# Altium PCB SumoPCB.PcbDoc
Units mm, origin at the board's own origin, x right, y up, seen from the top; angles counter-clockwise.
Board outline 140 x 140 mm, 2 copper layers (Top Layer, Bottom Layer); 186 components, 198 nets, 758 pads, 44 vias.
Unrouted connection lines stored in the file: 502.
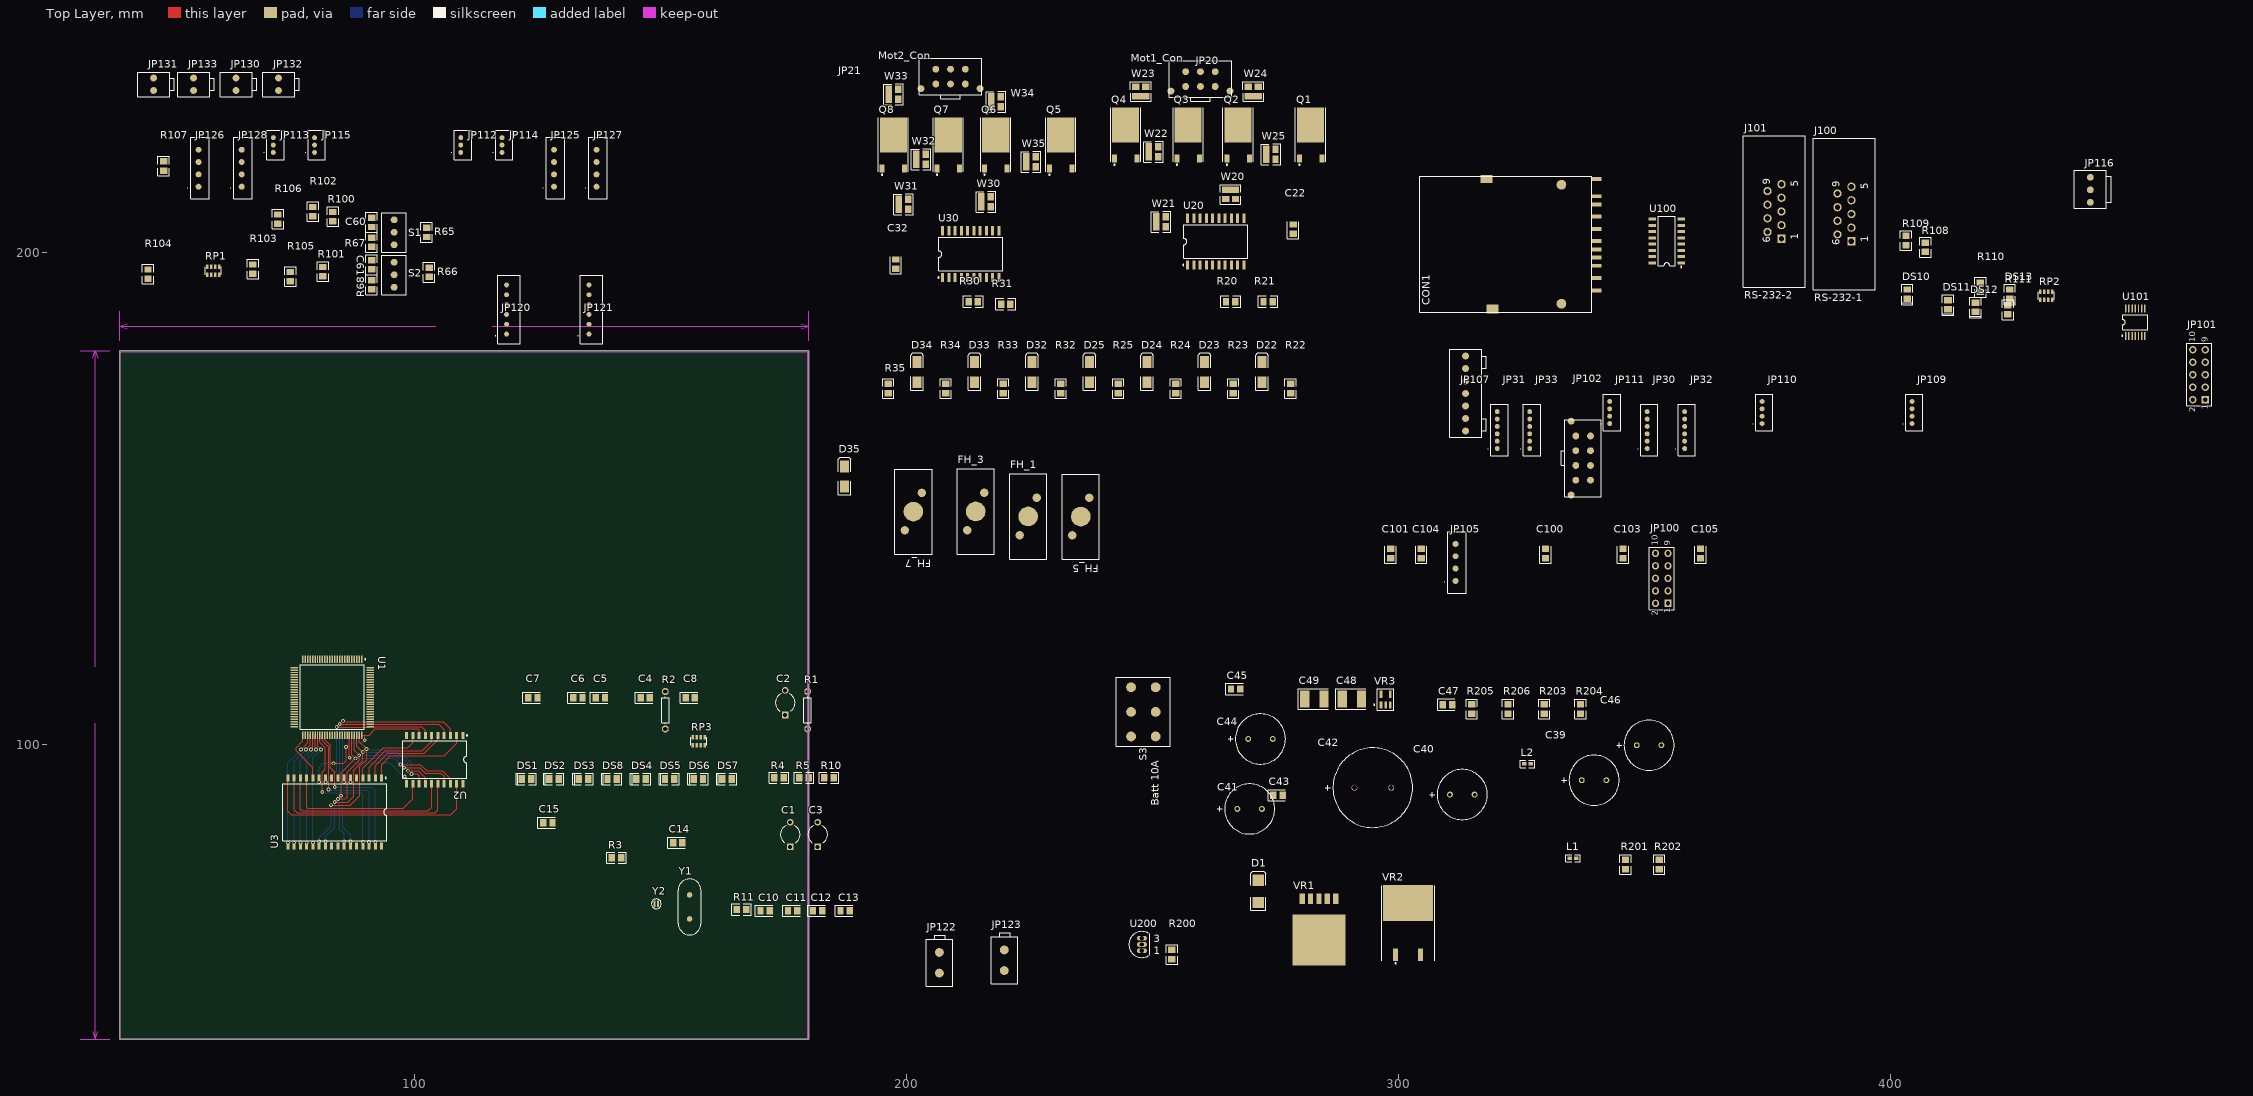
[diagram p0: Top Layer view]
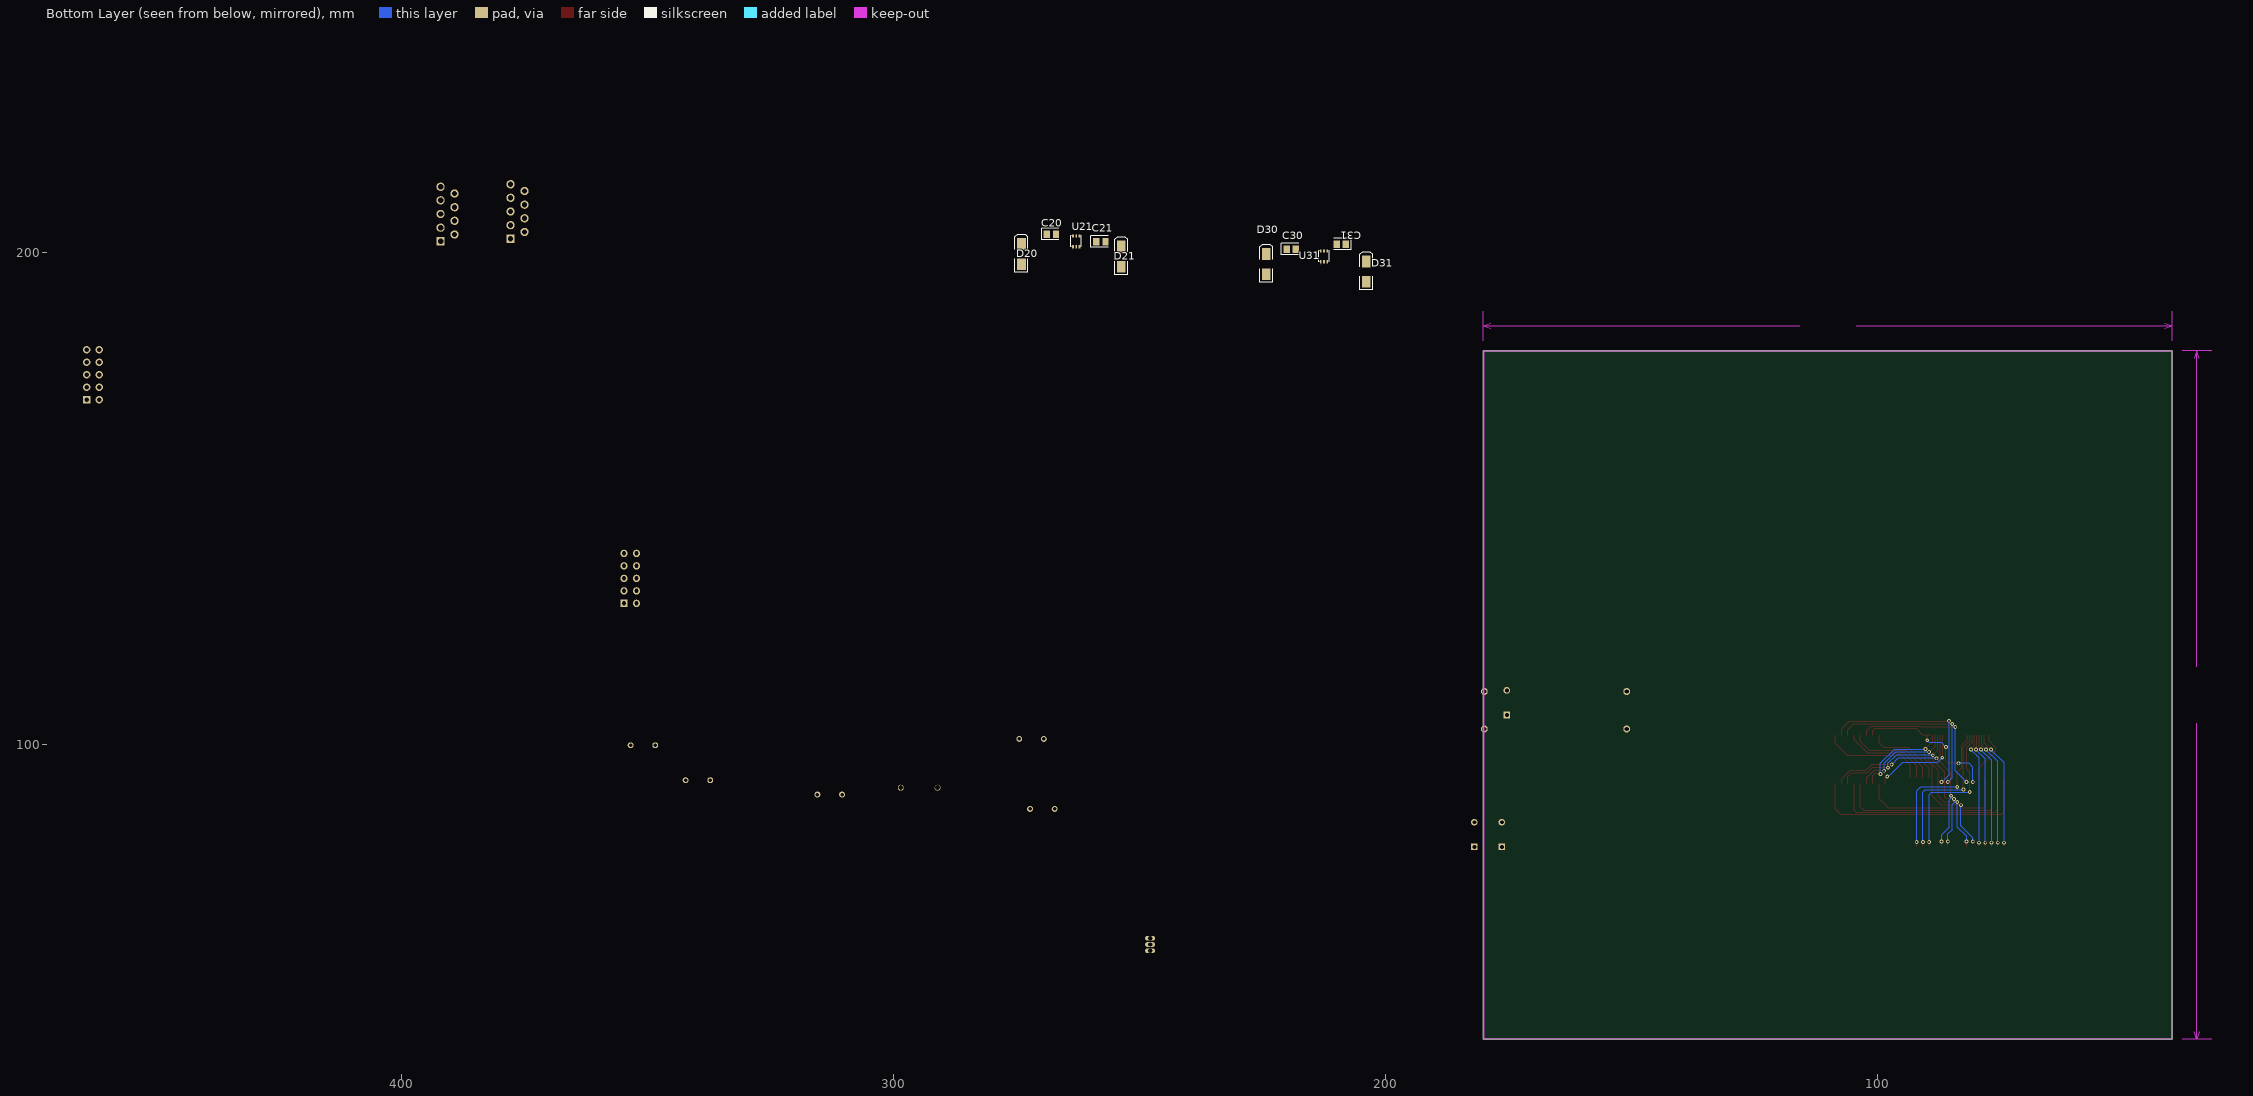
[diagram p1: Bottom Layer view, seen from below]

## Layer stack, top to bottom
Top Layer: signal copper 0.0356
Dielectric: dielectric 0.32, FR-4, Dk 4.8
Bottom Layer: signal copper 0.0356

## Board outline
40,40 180,40 180,180 40,180

## Design rules (kind name [scope] priority, off if disabled: settings)
Clearance [All] p1: gap=0.254
ComponentClearance [All] p1: gap=0.254 collisioncheckmode=0
PolygonConnect [All] p1: connectstyle=Relief reliefconductorwidth=0.254 reliefentries=4 polygonreliefangle="90 Angle"
RoomDefinition "Power Regulation and Protection" [InComponentClass('Power Regulation and Protection')] p1: confinementstyle=ConfineIn formatcopy=TRUE outline 238.633,51.816 360.299,51.816 360.299,116.078 238.633,116.078
RoomDefinition "Motor Control" [InComponentClass('Motor Control')] p2: confinementstyle=ConfineIn formatcopy=TRUE outline 184.658,129.667 289.56,129.667 289.56,242.062 184.658,242.062
RoomDefinition "Microcontroller and Memory" [InComponentClass('Microcontroller and Memory')] p3: confinementstyle=ConfineIn formatcopy=TRUE outline 56.642,56.261 192.278,56.261 192.278,123.698 56.642,123.698
RoomDefinition "Interfaces and Connectors - Sensors" [InComponentClass('Interfaces and Connectors - Sensors')] p4: confinementstyle=ConfineIn formatcopy=TRUE outline 38.608,188.468 148.209,188.468 148.209,241.3 38.608,241.3
RoomDefinition "Interfaces and Connectors" [InComponentClass('Interfaces and Connectors')] p5: confinementstyle=ConfineIn formatcopy=TRUE outline 292.354,118.11 473.329,118.11 473.329,229.108 292.354,229.108
RoutingLayers [All] p1: top layer=Horizontal bottom layer=Vertical
RoutingVias [All] p1: holewidth=0.711 width=1.27 viastyle="Through Hole" minholewidth=0.711 minwidth=1.27 maxholewidth=0.711 maxwidth=1.27
SolderMaskExpansion [All] p1: expansion=0.102
TestPointUsage [All] p1: valid=0 allowmultiple=FALSE
Testpoint [All] p1: side=15 testpointundercomponent=TRUE minsize=1.016 maxsize=2.54 preferedsize=1.524 minholesize=0 maxholesize=1.016 preferedholesize=0.813 testpointgrid=0.025 style=1023 order=1234567890
Width [All] p1: maxlimit=0.254 minlimit=0.254 preferedwidth=0.254
16 further rules are at their usual default settings.

## Classes and differential pairs
component class "Interfaces and Connectors - Sensors": C60 C61 JP112 JP113 JP114 JP115 JP120 JP121 JP125 JP126 JP127 JP128 JP130 JP131 JP132 JP133 R65 R66 R67 R68 R100 R101 R102 R103 R104 R105 R106 R107 RP1 S1 S2
component class "Interfaces and Connectors": C100 C101 C103 C104 C105 CON1 DS10 DS11 DS12 DS13 J100 J101 JP22 JP23 JP30 JP31 JP32 JP33 JP100 JP101 JP102 JP105 JP107 JP109 JP110 JP111 JP116 JP120 JP121 R108 R109 R110 R111 RP2 U100 U101
component class "Microcontroller and Memory": C1 C2 C3 C4 C5 C6 C7 C8 C10 C11 C12 C13 C14 C15 DS1 DS2 DS3 DS4 DS5 DS6 DS7 DS8 R1 R2 R3 R4 R5 R10 R11 RP3 U1 U2 U3 Y1 Y2
component class "Motor Control": C20 C21 C22 C30 C31 C32 D20 D21 D22 D23 D24 D25 D30 D31 D32 D33 D34 D35 FH_1 FH_2 FH_3 FH_4 FH_5 FH_6 FH_7 JP20 JP21 Q1 Q2 Q3 Q4 Q5 Q6 Q7 Q8 R20 R21 R22 R23 R24 R25 R30 R31 R32 R33 R34 R35 U20 U21 U30 U31 W20 W21 W22 W23 W24 W25 W30 W31 W32 W33 W34 W35
component class "Power Regulation and Protection": C39 C40 C41 C42 C43 C44 C45 C46 C47 C48 C49 D1 L1 L2 R200 R201 R202 R203 R204 R205 R206 S3 U200 VR1 VR2 VR3
net class A[8..15]: A0 A1 A2 A3 A4 A5 A6 A7 A8 A9 A10 A11 A12 A13 A14 A15
net class AD[0..7]: AD0 AD1 AD2 AD3 AD4 AD5 AD6 AD7

## Components (designator, comment, footprint, x,y, rotation, side; value= is the part's Value field where it differs from the comment)
C1 "Cap Tant" CAPR5-4X5 176.276,81.661 r90 top
C2 "Cap Tant" CAPR5-4X5 175.26,108.458 r90 top
C3 "Cap Tant" CAPR5-4X5 181.864,81.661 r90 top
C4 "20pF" CC2012-0805 146.812,109.474 r0 top
C5 "20pF" CC2012-0805 137.668,109.474 r0 top
C6 "6pF" CC2012-0805 133.096,109.474 r0 top
C7 "6pF" CC2012-0805 123.952,109.474 r0 top
C8 "100nF" CC2012-0805 155.956,109.474 r0 top
C10 "Cap Semi" CC2012-0805 171.196,66.167 r0 top
C11 "Cap Semi" CC2012-0805 176.784,66.167 r0 top
C12 "Cap Semi" CC2012-0805 181.864,66.167 r0 top
C13 "Cap Semi" CC2012-0805 187.452,66.167 r0 top
C14 "Cap Semi" CC2012-0805 153.416,80.01 r0 top
C15 "Cap Semi" CC2012-0805 127,84.074 r0 top
C20 "Cap Pol3" CC2012-0805 267.843,203.708 r180 bottom
C21 "Cap Pol3" CC2012-0805 257.793,202.184 r180 bottom
C22 "Cap" CC2012-0805 278.511,204.724 r90 top
C30 "Cap Pol3" CC2012-0805 219.075,200.66 r180 bottom
C31 "Cap Pol3" CC2012-0805 208.915,201.676 r0 bottom
C32 "Cap" CC2012-0805 197.739,197.612 r90 top
C39 "Cap Pol1" CAPPOL5-10X13 337.185,92.71 r0 top
C40 "Cap Pol1" CAPPOL5-10X13 310.388,89.789 r0 top
C41 "Cap Pol1" CAPPOL5-10X13 267.168,86.868 r0 top
C42 "Cap Pol1" CAPPOL7.5-16 290.957,91.186 r0 top
C43 "Cap Pol3" CC2012-0805 275.423,89.662 r0 top
C44 "Cap Pol1" CAPPOL5-10X13 269.367,101.092 r0 top
C45 "Cap Pol3" CC2012-0805 266.827,111.252 r0 top
C46 "Cap Pol1" CAPPOL5-10X13 348.361,99.822 r0 top
C47 "Cap Pol3" CC2012-0805 309.88,108.077 r0 top
C48 "Tant" CC4532-1812 290.449,109.22 r0 top
C49 "Low ESR 0.3-10R Tant" CC4532-1812 282.829,109.22 r0 top
C60 "Cap Semi" CR2012-0805 91.186,206.121 r90 top
C61 "Cap Semi" CR2012-0805 91.186,197.485 r270 top
C100 "Cap Semi" CC2012-0805 329.819,138.811 r90 top
C101 "Cap Semi" CC2012-0805 298.323,138.811 r90 top
C103 "Cap Semi" CC2012-0805 345.567,138.811 r90 top
C104 "Cap Semi" CC2012-0805 304.546,138.811 r90 top
C105 "Cap Semi" CC2012-0805 361.315,138.811 r90 top
CON1 "SD_CARD_CONN" "SD Card AVX" 340.233,192.278 r90 top
D1 "10BQ100" SMB 271.399,70.104 r90 top
D20 "Diode" SMA 273.939,199.644 r90 bottom
D21 "Diode" SMA 253.619,199.136 r90 bottom
D22 "Diode" SMA 272.161,175.641 r90 top
D23 "Diode" SMA 260.477,175.641 r90 top
D24 "Diode" SMA 248.793,175.641 r90 top
D25 "Diode" SMA 237.109,175.641 r90 top
D30 "Diode" SMA 224.155,197.612 r90 bottom
D31 "Diode" SMA 203.835,196.088 r90 bottom
D32 "Diode" SMA 225.425,175.641 r90 top
D33 "Diode" SMA 213.741,175.641 r90 top
D34 "Diode" SMA 202.057,175.641 r90 top
D35 "Diode" SMA 187.325,154.432 r90 top
DS1 "Bat" "SMD _LED" 122.682,92.964 r0 top
DS2 "12V" "SMD _LED" 128.27,92.964 r0 top
DS3 "5V" "SMD _LED" 134.239,92.964 r0 top
DS4 "Diag1" "SMD _LED" 145.923,92.964 r0 top
DS5 "Diag2" "SMD _LED" 151.765,92.964 r0 top
DS6 "Diag3" "SMD _LED" 157.607,92.964 r0 top
DS7 "Diag4" "SMD _LED" 163.449,92.964 r0 top
DS8 "3V3" "SMD _LED" 140.081,92.964 r0 top
DS10 "T1" "SMD _LED" 403.352,191.516 r90 top
DS11 "R1" "SMD _LED" 411.607,189.357 r90 top
DS12 "T2" "SMD _LED" 417.195,188.849 r90 top
DS13 "R2" "SMD _LED" 424.18,191.516 r90 top
FH_1 "SMot1" "FuseHolder Miniblade" 220.853,137.668 r0 top
FH_3 "SMot2" "FuseHolder Miniblade" 210.185,138.684 r0 top
FH_5 "Mot1_DC" "FuseHolder Miniblade" 239.141,154.94 r180 top
FH_7 "Mot2_DC" "FuseHolder Miniblade" 205.105,155.956 r180 top
J100 "RS-232-1" "DSUB1.385-2H9 Simple" 396.875,192.405 r90 top
J101 "RS-232-2" "DSUB1.385-2H9 Simple" 382.651,192.913 r90 top
JP20 "Mot1_Con" "microfit 2x3 3mm" 256.667,236.728 r180 top
JP21 "Mot2_Con" "microfit 2x3 3mm" 205.867,237.236 r180 top
JP30 "SPI 2" "ZHR 1x6 1.5mm" 352.679,158.623 r90 top
JP31 "SPI 3" "ZHR 1x6 1.5mm" 322.199,158.623 r90 top
JP32 "SPI 4" "ZHR 1x6 1.5mm" 360.299,158.623 r90 top
JP33 "SPI 5" "ZHR 1x6 1.5mm" 328.803,158.623 r90 top
JP100 "JTAG" HDR2X5 354.711,128.651 r90 top
JP101 "ISP" HDR2X5 463.931,170.053 r90 top
JP102 "Voltage Outputs" "microfit 2x4 3mm" 338.963,162.687 r90 top
JP105 "PORTL" "EHR 1x4 2.5mm" 311.531,133.223 r90 top
JP107 "ADC Inputs" "KK 1x7 2.54mm" 313.563,163.703 r90 top
JP109 "I2C1" "ZHR 1x4 1.5mm" 406.527,163.703 r90 top
JP110 "I2C2" "ZHR 1x4 1.5mm" 376.047,163.703 r90 top
JP111 "I2C3" "ZHR 1x4 1.5mm" 345.059,163.703 r90 top
JP112 "IRD1" "ZHR 1x3 1.5mm" 111.506,218.821 r90 top
JP113 "IRD2" "ZHR 1x3 1.5mm" 73.406,218.821 r90 top
JP114 "IRD3" "ZHR 1x3 1.5mm" 119.888,218.821 r90 top
JP115 "IRD4" "ZHR 1x3 1.5mm" 81.788,218.821 r90 top
JP116 "Snd" "KK 1x3 2.54mm" 440.563,210.185 r90 top
JP120 "Mouse1" "PHR 1x6 2mm" 118.618,183.388 r90 top
JP121 "Mouse2" "PHR 1x6 2mm" 135.382,183.388 r90 top
JP122 "B out" "Mini-Fit Jnr 2x1 4.2mm" 209.296,50.8 r90 top
JP123 "B In" "Mini-Fit Jnr 2x1 4.2mm" 222.504,51.308 r90 top
JP125 "Line1" "EHR 1x4 2.5mm" 128.27,213.36 r90 top
JP126 "Line2" "EHR 1x4 2.5mm" 56.007,213.36 r90 top
JP127 "Line3" "EHR 1x4 2.5mm" 136.906,213.36 r90 top
JP128 "Line4" "EHR 1x4 2.5mm" 64.77,213.36 r90 top
JP130 "Bmp1" "KK 1x2 2.54mm" 63.627,232.918 r90 top
JP131 "Bmp2" "KK 1x2 2.54mm" 46.863,232.918 r90 top
JP132 "Bmp3" "KK 1x2 2.54mm" 72.263,232.918 r90 top
JP133 "Bmp4" "KK 1x2 2.54mm" 54.991,232.918 r90 top
L1 "Inductor" C1005-0402 335.407,76.835 r0 top
L2 "Inductor" C1005-0402 326.136,96.012 r0 top
Q1 "IRFR2405" TO-252AA 282.067,222.504 r0 top
Q2 "IRFR2405" TO-252AA 267.335,222.504 r0 top
Q3 "IRFR2405" TO-252AA 257.175,222.504 r0 top
Q4 "IRFR2405" TO-252AA 244.475,222.504 r0 top
Q5 "IRFR2405" TO-252AA 231.267,220.472 r0 top
Q6 "IRFR2405" TO-252AA 218.059,220.472 r0 top
Q7 "IRFR2405" TO-252AA 208.407,220.472 r0 top
Q8 "IRFR2405" TO-252AA 197.231,220.472 r0 top
R1 "0K" AXIAL-0.3 179.832,106.934 r90 top
R2 "0K" AXIAL-0.3 150.876,106.934 r90 top
R3 "Res3" R2012-0805 140.97,76.962 r0 top
R4 "Res3" R2012-0805 173.99,93.218 r0 top
R5 "Res3" R2012-0805 179.07,93.218 r0 top
R10 "Res3" R2012-0805 184.15,93.218 r0 top
R11 "Res3" R2012-0805 166.37,66.421 r0 top
R20 "Res Semi" CR2012-0805 265.811,189.992 r0 top
R21 "Res Semi" CR2012-0805 273.431,189.992 r0 top
R22 "Res Semi" CR2012-0805 278.003,172.339 r90 top
R23 "Res Semi" CR2012-0805 266.319,172.339 r90 top
R24 "Res Semi" CR2012-0805 254.635,172.339 r90 top
R25 "Res Semi" CR2012-0805 242.951,172.339 r90 top
R30 "Res Semi" CR2012-0805 213.487,189.992 r0 top
R31 "Res Semi" CR2012-0805 220.091,189.484 r0 top
R32 "Res Semi" CR2012-0805 231.267,172.339 r90 top
R33 "Res Semi" CR2012-0805 219.583,172.339 r90 top
R34 "Res Semi" CR2012-0805 207.899,172.339 r90 top
R35 "Res Semi" CR2012-0805 196.215,172.339 r90 top
R65 "Res3" R2012-0805 102.362,204.089 r270 top
R66 "Res3" R2012-0805 102.87,195.961 r90 top
R67 "Res3" R2012-0805 91.186,202.057 r90 top
R68 "Res3" R2012-0805 91.186,193.421 r90 top
R100 "Res1" R2012-0805 83.312,207.264 r90 top
R101 "Res1" R2012-0805 81.28,196.088 r90 top
R102 "Res1" R2012-0805 79.248,208.28 r90 top
R103 "Res1" R2012-0805 67.056,196.596 r90 top
R104 "Res1" R2012-0805 45.72,195.58 r90 top
R105 "Res1" R2012-0805 74.676,195.072 r90 top
R106 "Res1" R2012-0805 72.136,206.756 r90 top
R107 "Res1" R2012-0805 48.895,217.551 r90 top
R108 "Res3" CR2012-0805 407.035,201.041 r90 top
R109 "Res3" CR2012-0805 403.098,202.438 r90 top
R110 "10K" CR2012-0805 418.211,192.913 r90 top
R111 "10K" CR2012-0805 423.799,188.341 r90 top
R200 "10K" R2012-0805 253.873,57.277 r90 top
R201 "Res3" R2012-0805 346.075,75.565 r90 top
R202 "Res3" R2012-0805 352.933,75.565 r90 top
R203 "Res3" R2012-0805 329.565,107.188 r90 top
R204 "Res3" R2012-0805 336.931,107.188 r90 top
R205 "Res3" R2012-0805 314.833,107.188 r90 top
R206 "Res3" R2012-0805 322.199,107.188 r90 top
RP1 "ResPack x4" "4x0603 Resistor pack" 57.785,195.453 r0 top
RP2 "ResPack x4" "4x0603 Resistor pack" 430.403,190.373 r0 top
RP3 "ResPack x4" "4x0603 Resistor pack" 156.464,99.822 r0 top
S1 "SW-SPDT" "SW SPDT" 95.758,201.549 r90 top
S2 "SW-SPDT" "SW SPDT" 95.758,192.913 r90 top
S3 "Batt 10A" "SW  DPDT" 250.571,101.6 r90 top
U1 "ATmega2560" F-QFP14X14-G100/Z17N 83.185,109.601 r270 top
U2 "74HC373M" SO-G20/Y1.45 104.013,96.901 r180 top
U3 "K6R1008C1D" SO-G32/Y1.45 83.693,86.233 r180 top
U20 "HIP4081AIBZ" SOIC20A 262.763,202.184 r0 top
U21 "SN74LVC2G14" SC70 263.847,201.168 r180 bottom
U30 "HIP4081AIBZ" SOIC20A 212.979,199.644 r0 top
U31 "SN74LVC2G14" SC70 213.487,198.12 r180 bottom
U100 "MAX232" SO-G16/C5.85 354.457,202.311 r90 top
U101 "MAX3392E" TSSOP14 449.707,185.801 r0 top
U200 "ZM33064" BCY-W3 247.777,59.309 r0 top
VR1 "LM2595S-5.0" "TO-263 5 Pin SMT" 287.147,68.58 r90 top
VR2 "MC7812CD2T" 936-03 301.879,62.484 r0 top
VR3 "TPS76333DBVR" SOT-23-5 297.307,109.093 r0 top
W20 "Jumper SMT 3Way" "Jumper SMT 3 Way" 264.795,209.296 r270 top
W21 "Jumper SMT 3Way" "Jumper SMT 3 Way" 254.127,205.232 r0 top
W22 "Jumper SMT 3Way" "Jumper SMT 3 Way" 252.603,219.456 r0 top
W23 "Jumper SMT 3Way" "Jumper SMT 3 Way" 248.539,235.204 r90 top
W24 "Jumper SMT 3Way" "Jumper SMT 3 Way" 271.399,235.204 r90 top
W25 "Jumper SMT 3Way" "Jumper SMT 3 Way" 276.479,218.948 r0 top
W30 "Jumper SMT 3Way" "Jumper SMT 3 Way" 218.567,209.296 r0 top
W31 "Jumper SMT 3Way" "Jumper SMT 3 Way" 201.803,208.788 r0 top
W32 "Jumper SMT 3Way" "Jumper SMT 3 Way" 205.359,217.932 r0 top
W33 "Jumper SMT 3Way" "Jumper SMT 3 Way" 199.771,231.14 r0 top
W34 "Jumper SMT 3Way" "Jumper SMT 3 Way" 220.599,229.616 r0 top
W35 "Jumper SMT 3Way" "Jumper SMT 3 Way" 227.711,217.424 r0 top
Y1 "16MHz" "Crystal HC49SLF" 155.829,64.516 r90 top
Y2 "32kHz" "Crystal CFS206" 148.717,67.564 r0 top

## Footprints (in the part's own frame and the unit in brackets; to place one, negate y for a bottom-side part, rotate by r counter-clockwise, add the part's x,y. Pads: shape width x height; smd on the part's side, far side on the other; paste and mask are expansions set on the pad)
"4x0603 Resistor pack" [mm] "4x0603 Resistor pack 3.2 x 1.6mm, 0.8mm Pitch"
  rect 0.5x0.9 smd: 1(0,0) 2(0.8,0) 3(1.6,0) 4(2.4,0) 5(2.4,1.6) 6(1.6,1.6) 7(0.8,1.6) 8(0,1.6)
  silkscreen extent -0.4,0 2.8,1.6
936-03 [mm] "D2-PAK/TO-263-AB; 3 Leads (1 Cropped); Body 14.7 (inc. leads) x 10.2 mm (LxW max)"
  rect 1x2.6 smd: 1(-2.54,-5.25) 3(2.54,-5.25)
  rect 10.2x7.3 smd: 4(0,5.25)
  silkscreen extent -5.4,-7.12 5.4,8.8
AXIAL-0.3 [mm]
  round 1.4 hole 0.85: 1(-3.81,0) 2(3.81,0)
  silkscreen extent -2.77,-0.76 2.77,0.76
BCY-W3 [mm]
  oval 2x1 hole 0.9: 1(0,-1.27) 2(0,0) 3(0,1.27)
  silkscreen extent -2.65,-2.65 1.55,2.65
C1005-0402 [mm]
  rect 0.9x0.7 smd: 1(-0.65,0) 2(0.65,0)
  silkscreen extent -1.5,-0.75 1.5,0.75
CAPPOL5-10X13 [mm]
  round 1.2 hole 0.7: 1(0,0) 2(5,0)
  silkscreen extent -4.06,-5.1 7.6,5.1
CAPPOL7.5-16 [mm] "7.5P, 16D, 0.8PD"
  round 1.2 hole 1: 1(0,0) 2(7.5,0)
  silkscreen extent -5.9,-8.1 11.85,8.1
CAPR5-4X5 [mm]
  rect 1.35x1.35 hole 0.8: 1(-2.5,0)
  round 1.35 hole 0.8: 2(2.5,0)
  silkscreen extent -1.69,-2 1.82,2
CC2012-0805 [mm]
  rect 1.3x1.5 smd: 1(-0.95,0) 2(0.95,0)
  silkscreen extent -2,-1.15 1.5,1.15
CC4532-1812 [mm]
  rect 1.9x3.4 smd: 1(-1.95,0) 2(1.95,0)
  silkscreen extent -3.3,-2.1 2.8,2.1
CR2012-0805 [mm]
  rect 1.3x1.5 smd: 1(-0.95,0) 2(0.95,0)
  silkscreen extent -2,-1.15 2,1.15
"Crystal CFS206" [mm] "Crystal CFS206 0.7mm pitch 0.2mm lead"
  oval 0.45x1.4 smd: 1(0,0) 2(0.7,0)
  silkscreen extent -0.65,-1 1.35,1
"Crystal HC49SLF" [mm] "HC49SLF TH 4.88mm Pitch, 0.43mm lead"
  round 1.1 smd: 1(0,0) 2(4.88,0)
  silkscreen extent -3.23,-2.32 8.12,2.32
"DSUB1.385-2H9 Simple" [mm]
  rect 1.69x1.69 hole 1.09: 1(9.86,4.88)
  round 1.69 hole 1.09: 2(12.63,4.88) 3(15.4,4.88) 4(18.17,4.88) 5(20.94,4.88) 6(11.245,7.72) 7(14.015,7.72) 8(16.785,7.72) 9(19.555,7.72)
  silkscreen extent 0,0 30.8,12.6
"EHR 1x4 2.5mm" [mm] "JST EHR 1x4 2.5mm 3A"
  round 1.2 smd: 1(0,0) 2(2.5,0) 3(5,0) 4(7.5,0)
  silkscreen extent -2.5,-2.2 10,2.2
F-QFP14X14-G100/Z17N [mm]
  rect 1.55x0.3 smd: 1(-7.725,6) 2(-7.725,5.5) 3(-7.725,5) 4(-7.725,4.5) 5(-7.725,4) 6(-7.725,3.5) 7(-7.725,3) 8(-7.725,2.5) 9(-7.725,2) 10(-7.725,1.5) 11(-7.725,1) 12(-7.725,0.5) 13(-7.725,0) 14(-7.725,-0.5) 15(-7.725,-1) 16(-7.725,-1.5) 17(-7.725,-2) 18(-7.725,-2.5) 19(-7.725,-3) 20(-7.725,-3.5) 21(-7.725,-4) 22(-7.725,-4.5) 23(-7.725,-5) 24(-7.725,-5.5) 25(-7.725,-6) 51(7.725,-6) 52(7.725,-5.5) 53(7.725,-5) 54(7.725,-4.5) 55(7.725,-4) 56(7.725,-3.5) 57(7.725,-3) 58(7.725,-2.5) 59(7.725,-2) 60(7.725,-1.5) 61(7.725,-1) 62(7.725,-0.5) 63(7.725,0) 64(7.725,0.5) 65(7.725,1) 66(7.725,1.5) 67(7.725,2) 68(7.725,2.5) 69(7.725,3) 70(7.725,3.5) 71(7.725,4) 72(7.725,4.5) 73(7.725,5) 74(7.725,5.5) 75(7.725,6)
  rect 0.3x1.55 smd: 26(-6,-7.725) 27(-5.5,-7.725) 28(-5,-7.725) 29(-4.5,-7.725) 30(-4,-7.725) 31(-3.5,-7.725) 32(-3,-7.725) 33(-2.5,-7.725) 34(-2,-7.725) 35(-1.5,-7.725) 36(-1,-7.725) 37(-0.5,-7.725) 38(0,-7.725) 39(0.5,-7.725) 40(1,-7.725) 41(1.5,-7.725) 42(2,-7.725) 43(2.5,-7.725) 44(3,-7.725) 45(3.5,-7.725) 46(4,-7.725) 47(4.5,-7.725) 48(5,-7.725) 49(5.5,-7.725) 50(6,-7.725) 76(6,7.725) 77(5.5,7.725) 78(5,7.725) 79(4.5,7.725) 80(4,7.725) 81(3.5,7.725) 82(3,7.725) 83(2.5,7.725) 84(2,7.725) 85(1.5,7.725) 86(1,7.725) 87(0.5,7.725) 88(0,7.725) 89(-0.5,7.725) 90(-1,7.725) 91(-1.5,7.725) 92(-2,7.725) 93(-2.5,7.725) 94(-3,7.725) 95(-3.5,7.725) 96(-4,7.725) 97(-4.5,7.725) 98(-5,7.725) 99(-5.5,7.725) 100(-6,7.725)
  silkscreen extent -7.85,-6.55 6.55,6.83
"FuseHolder Miniblade" [mm] "FuseHolder Miniblade"
  round 1.7 smd: 1(2.07,4.84) 2(5.53,12.46)
  round 4 smd: ""(3.8,8.65)
  silkscreen extent 0,0 7.6,17.3
HDR2X5 [mm] "Connector; Header; 5x2 Position"
  rect 1.5x1.5 hole 0.9: 1(0,0)
  round 1.5 hole 0.9: 2(0,2.54) 3(2.54,0) 4(2.54,2.54) 5(5.08,0) 6(5.08,2.54) 7(7.62,0) 8(7.62,2.54) 9(10.16,0) 10(10.16,2.54)
  silkscreen extent -1.27,-1.27 11.43,3.81
"Jumper SMT 3 Way" [mm]
  rect 1.3x3.5 smd: 1(-3.45,1)
  rect 1.3x1.5 smd: 2(-1.55,2) 3(-1.55,0)
  silkscreen extent -4.5,-1.15 -0.5,3.1
"KK 1x2 2.54mm" [mil] "KK 1x2 2.54mm 4A"
  round 55 smd: 1(0,0) 2(100,0)
  silkscreen extent -49,-167 148,128
"KK 1x3 2.54mm" [mil] "KK 1x3 2.54mm 4A"
  round 55 smd: 1(0,0) 2(100,0) 3(200,0)
  silkscreen extent -49,-167 256,128
"KK 1x7 2.54mm" [mil] "Molex KK 1x7 2.54mm 4A"
  round 55 smd: 1(0,0) 2(100,0) 3(200,0) 4(300,0) 5(400,0) 6(500,0) 7(600,0)
  silkscreen extent -49,-167 654,128
"microfit 2x3 3mm" [mm] "microfit 2x3 3mm 5A"
  round 1.4 smd: 1(0,0) 2(-3,0) 3(-6,0) 4(0,3) 5(-3,3) 6(-6,3) nc(-9,3.94) nc(3,3.94)
  silkscreen extent -9.33,-2.18 3.32,6
"microfit 2x4 3mm" [mm] "microfit 2x4 3mm 5A"
  round 1.4 smd: 1(0,0) 2(-3,0) 3(-6,0) 4(-9,0) 5(0,3) 6(-3,3) 7(-6,3) 8(-9,3) nc(-12,3.94) nc(3,3.94)
  silkscreen extent -12.32,-2.18 3.32,6
"Mini-Fit Jnr 2x1 4.2mm" [mm] "Mini-Fit Jnr 2x1 4.2mm pitch 9A"
  round 1.8 smd: 1(2.7,2.7) 2(6.9,2.7)
  silkscreen extent 0,0 10.4,5.4
"PHR 1x6 2mm" [mm] "JST PHR 1x6 2mm 2A"
  round 1 smd: 1(0,0) 2(2,0) 3(4,0) 4(6,0) 5(8,0) 6(10,0)
  silkscreen extent -2,-2.8 12,2.2
R2012-0805 [mm]
  rect 1.3x1.5 smd: 1(-0.95,0) 2(0.95,0)
  silkscreen extent -2,-1.15 2,1.15
SC70 [mm] "6 pin, 0.65 pitch"
  rect 0.35x0.66 smd: 1(0.425,0) 2(1.075,0) 3(1.725,0) 4(1.725,2.14) 5(1.075,2.14) 6(0.425,2.14)
  silkscreen extent 0,0 2.1,2.2
"SD Card AVX" [mm] "SD Card AVX 145638009211862"
  rect 0.8x2 smd: 1(2.5,0) 2(5,0) 3(8.3,0) 4(10,0) 5(12.5,0) 6(15,0) 7(17.43,0) 8(19.13,0) 9(0,0) 10(6.7,0) 11(22.62,0)
  rect 1.7x2.4 smd: 12(22.63,22.4)
  rect 1.8x2.4 smd: ""(-3.82,21.2)
  round 2 smd: ""(-2.72,7.2) ""(21.48,7.2)
  silkscreen extent -4.42,1 23.18,36
SMA [mm] "DO-214-AC/SMA; 2 C-Bend Leads; Body 5 x 2.7 mm, inc. leads (LxW)"
  rect 2.4x1.8 smd: 1(-2.05,0) 2(2.05,0)
  silkscreen extent -3.65,-1.3 3.95,1.3
SMB [mm] "DO-214-AA/SMB; 2 C-Bend Leads; Body 5.3 x 3.6 mm, inc. leads (LxW)"
  rect 2.3x2.3 smd: 1(-2.25,0) 2(2.25,0)
  silkscreen extent -3.8,-1.55 4.1,1.55
"SMD _LED" [mm]
  rect 1.3x1.6 smd: 1(0.95,0) 2(-0.95,0)
  silkscreen extent -2.13,-1.15 2,1.15
SO-G16/C5.85 [mm]
  rect 0.6x1.55 smd: 1(-4.445,-2.925) 2(-3.175,-2.925) 3(-1.905,-2.925) 4(-0.635,-2.925) 5(0.635,-2.925) 6(1.905,-2.925) 7(3.175,-2.925) 8(4.445,-2.925) 9(4.445,2.925) 10(3.175,2.925) 11(1.905,2.925) 12(0.635,2.925) 13(-0.635,2.925) 14(-1.905,2.925) 15(-3.175,2.925) 16(-4.445,2.925)
  silkscreen extent -5.39,-3.05 5,1.75
SO-G20/Y1.45 [mm]
  rect 0.6x1.45 smd: 1(-5.715,-4.925) 2(-4.445,-4.925) 3(-3.175,-4.925) 4(-1.905,-4.925) 5(-0.635,-4.925) 6(0.635,-4.925) 7(1.905,-4.925) 8(3.175,-4.925) 9(4.445,-4.925) 10(5.715,-4.925) 11(5.715,4.925) 12(4.445,4.925) 13(3.175,4.925) 14(1.905,4.925) 15(0.635,4.925) 16(-0.635,4.925) 17(-1.905,4.925) 18(-3.175,4.925) 19(-4.445,4.925) 20(-5.715,4.925)
  silkscreen extent -6.69,-5.05 6.48,3.8
SO-G32/Y1.45 [mm]
  rect 0.6x1.45 smd: 1(-9.525,-6.925) 2(-8.255,-6.925) 3(-6.985,-6.925) 4(-5.715,-6.925) 5(-4.445,-6.925) 6(-3.175,-6.925) 7(-1.905,-6.925) 8(-0.635,-6.925) 9(0.635,-6.925) 10(1.905,-6.925) 11(3.175,-6.925) 12(4.445,-6.925) 13(5.715,-6.925) 14(6.985,-6.925) 15(8.255,-6.925) 16(9.525,-6.925) 17(9.525,6.925) 18(8.255,6.925) 19(6.985,6.925) 20(5.715,6.925) 21(4.445,6.925) 22(3.175,6.925) 23(1.905,6.925) 24(0.635,6.925) 25(-0.635,6.925) 26(-1.905,6.925) 27(-3.175,6.925) 28(-4.445,6.925) 29(-5.715,6.925) 30(-6.985,6.925) 31(-8.255,6.925) 32(-9.525,6.925)
  silkscreen extent -10.58,-7.05 10.58,5.8
SOIC20A [mm]
  rect 0.6x1.9 smd: 1(-5.715,-4.75) 2(-4.445,-4.75) 3(-3.175,-4.75) 4(-1.905,-4.75) 5(-0.635,-4.75) 6(0.635,-4.75) 7(1.905,-4.75) 8(3.175,-4.75) 9(4.445,-4.75) 10(5.715,-4.75) 11(5.715,4.75) 12(4.445,4.75) 13(3.175,4.75) 14(1.905,4.75) 15(0.635,4.75) 16(-0.635,4.75) 17(-1.905,4.75) 18(-3.175,4.75) 19(-4.445,4.75) 20(-5.715,4.75)
  silkscreen extent -6.69,-4.87 6.5,3.4
SOT-23-5 [mm]
  rect 0.55x1.45 smd: 1(-0.95,-1.075) 2(0,-1.075) 3(0.95,-1.075) 4(0.95,1.075) 5(-0.95,1.075)
  silkscreen extent -2.42,-2.2 1.65,2.2
"SW  DPDT" [mm] "Alltronics Toggle"
  round 2 smd: 1(0,0) 2(5,0) 3(10,0) 4(0,5) 5(5,5) 6(10,5)
  silkscreen extent -2,-3 12,8
"SW SPDT" [mm] "SW SPDT 0.1\" pitch"
  round 1.4 smd: 1(0,0) 2(2.54,0) 3(5.08,0)
  silkscreen extent -1.5,-2.5 6.5,2.5
TO-252AA [mm] "D-PAK/TO-252-AA; 3 Leads (1 Cropped); Body 10.4 (inc. leads) x 6.7 mm (LxW max)"
  rect 1x1.6 smd: 1(-2.285,-3.425) 3(2.285,-3.425)
  rect 5.5x7.1 smd: 4(0,3.425)
  silkscreen extent -3.08,-4.8 3.08,6.88
"TO-263 5 Pin SMT" [mm] "TO-263 5 Pin SMT"
  rect 2.16x1.07 smd: 1(0,0) 2(0,1.7) 3(0,3.4) 4(0,5.1) 5(0,6.8)
  rect 10.41x10.8 smd: 3(-8.33,3.4)
TSSOP14 [mm] "Shrink Small Outline; 14 Leads; Body Width 4.4 mm; Pitch 0.65 mm"
  rect 0.3x1.65 smd: 1(-1.95,-2.775) 2(-1.3,-2.775) 3(-0.65,-2.775) 4(0,-2.775) 5(0.65,-2.775) 6(1.3,-2.775) 7(1.95,-2.775) 8(1.95,2.775) 9(1.3,2.775) 10(0.65,2.775) 11(0,2.775) 12(-0.65,2.775) 13(-1.3,2.775) 14(-1.95,2.775)
  silkscreen extent -2.77,-2.9 2.55,1.55
"ZHR 1x3 1.5mm" [mm] "JST ZHR 1x3 1.5mm 1A"
  round 1 smd: 1(1.5,2.2) 2(3,2.2) 3(4.5,2.2)
  silkscreen extent 0,0 6,4.1
"ZHR 1x4 1.5mm" [mm] "JST ZHR 1x4 1.5mm 1A"
  round 1 smd: 1(1.5,2.2) 2(3,2.2) 3(4.5,2.2) 4(6,2.2)
  silkscreen extent 0,0 7.5,4.1
"ZHR 1x6 1.5mm" [mm] "JST ZHR 1x6 1.5mm 1A"
  round 1 smd: 1(1.5,2.2) 2(3,2.2) 3(4.5,2.2) 4(6,2.2) 5(7.5,2.2) 6(9,2.2)
  silkscreen extent 0,0 10.5,4.1

## Part data
C1 C2 C3 C100 C101 C103 C104 C105: library part "Cap Pol2", "Polarized Capacitor (Axial)"
C4 C5 C6 C7 C8: library part Cap, "Capacitor"
C10 C11 C12 C13 C14 C15 C60 C61: "Capacitor (Semiconductor SIM Model)"
C20 C21 C30 C31 C43 C45 C47: "Polarized Capacitor (Surface Mount)"
C22 C32: "Capacitor"
C39 C40 C41 C42 C44 C46: "Polarized Capacitor (Radial)"
C48 C49: library part "Cap Semi", "Capacitor (Semiconductor SIM Model)"
D1: "Schottky Rectifier"
D20 D21 D22 D23 D24 D25 D30 D31 D32 D33 D34 D35: "Default Diode"
DS1 DS2 DS3 DS4 DS5 DS6 DS7 DS8 DS10 DS11 DS12 DS13: library part LED3, "Typical BLUE SiC LED"
FH_1 FH_3 FH_5: library part Fuse_Holder, "Fuse Holder"
FH_7: library part Fuse_Holder
J100 J101: library part "D Connector 9", "Receptacle Assembly, 9 Position, Right Angle"
JP20 JP21 JP30 JP31 JP32 JP33: library part "Header 6", "Header, 6-Pin"
JP100 JP101: library part "Header 5X2", "Header, 5-Pin, Dual row"
JP102: library part "Header 4X2", "Header, 4-Pin, Dual row"
JP105 JP107 JP109 JP110 JP111: library part "Header 4", "Header, 4-Pin"
JP112 JP113 JP114 JP115: library part MHDR1X3, "Header, 3-Pin"
JP116: library part "Header 3", "Header, 3-Pin"
JP120 JP121 JP122 JP123 JP130 JP131 JP132 JP133: library part "Header 2", "Header, 2-Pin"
JP125 JP126 JP127 JP128: library part "Header 4H", "Header, 4-Pin, Right Angle"
Q1 Q2 Q3 Q4 Q5 Q6 Q7 Q8: "HEXFET Power MOSFET"
R1 R2 R110 R111 R200: library part Res1, "Resistor"
R3 R4 R5 R10 R11 R65 R66 R67 R68 R100 R101 R102 R103 R104 R105 R106 R107 R108 R109 R201 R202 R203 R204 R205 R206: "Resistor"
R20 R21 R30 R31: library part "RPot SM", "Square Trimming Potentiometer"
R22 R23 R24 R25 R32 R33 R34 R35: "Semiconductor Resistor"
S1 S2: library part SW-PB, "Switch"
S3: library part SW-SPDT, "SPDT Subminiature Toggle Switch, Right Angle Mounting, Vertical Actuation"
U1: "Atmel ATmega2560 MCU"
U2: library part 74373, "Octal 8-bit D-type Latch"
U3: "Samsung 128Kx8 High-Speed Static RAM"
U20 U30: "80V/2.5A Peak, High Frequency Full Bridge FET Driver"
U21 U31: "Dual Schmitt-Trigger Inverter"
U100: "Maxim RS-232 Transceiver"
U200: "Generic 5V Supply Voltage Monitor"
VR1: "Simple Switcher Power Converter 150 kHz 1A Step Down Voltage Regulator"
VR2: "Three-Terminal Positive Voltage Regulator"
Y1 Y2: library part XTAL, "Crystal Oscillator"

## Via types
v1: diameter 0.762, hole 0.381, Top Layer to Bottom Layer, 44 vias

## Nets (pads, with @x,y where several pads share a name; then routed paths per layer and width w, separated by ;. In a path a pad name is that pad's centre, name@x,y a point inside that pad or via, vN(x,y) a via of type N, cw(c..) or ccw(c..) an arc to the next point about the centre after c; other vN are vias at no path point)
3V3: C49.2 CON1.4 JP102.7 R10.2 U101.1 VR3.5
"3V3 ENABLE": U1.79 VR3.3
5V: C1.1 C2.1 C3.1 C10.2 C11.2 C12.2 C13.2 C14.2 C15.2 C41.1 C43.1 C48.2 C105.1 JP30.2 JP31.2 JP32.2 JP33.2 JP100.4 JP100.7 JP101.2 JP102.5 JP107.3 JP109.2 JP110.2 JP111.2 JP112.3 JP113.3 JP114.3 JP115.3 JP120.2 JP121.2 L2.2 R1.2 R5.2 R11.1 R65.2 R66.2 R100.1 R101.1 R102.1 R103.1 R104.1 R105.1 R106.1 R107.1 R108.2 R109.2 R110.2 R111.2 R200.2 R205.1 RP1.5 RP1.6 RP1.7 RP1.8 U1.10 U1.31 U1.61 U1.80 U2.20 U3.8 U3.24 U21.5 U31.5 U100.16 U101.14 U200.2 VR1.4 VR3.1
5VSENSE: R205.2 R206.1 U1.87
12V: C22.2 C32.2 C46.1 C47.1 D20.1 D21.1 D30.1 D31.1 JP102.1 JP102.3 JP116.2 R4.2 R203.1 U20.2 U20.7 U20.15 U20.16 U30.2 U30.7 U30.15 U30.16 VR2.3
12VSENSE: R203.2 R204.1 U1.88
A0: U2.2 U3.1 | length 21.4
  Top Layer w0.254: U3.1 93.218,95.885 94.996,97.663 105.918,97.663 108.458,100.203 U2.2
A1: U2.5 U3.2 | length 18.2
  Top Layer w0.254: U3.2 91.948,95.631 94.488,98.171 101.854,98.171 104.648,100.965 U2.5
A2: U2.6 U3.3 | length 18.3
  Top Layer w0.254: U3.3 90.678,95.377 93.98,98.679 101.473,98.679 103.378,100.584 U2.6
A3: U2.9 U3.4 | length 15.8
  Top Layer w0.254: U3.4 89.408,95.123 93.599,99.314 98.552,99.314 99.568,100.33 U2.9
A4: U2.12 U3.13 | length 31.5
  Top Layer w0.254: U3.13 77.978,87.249 78.232,86.995 97.663,86.995 99.568,88.9 U2.12
A5: U2.15 U3.14 | length 38.2
  Top Layer w0.254: U3.14 76.708,86.868 77.089,86.487 102.616,86.487 103.378,87.249 U2.15
A6: U2.16 U3.15 | length 41.5
  Top Layer w0.254: U3.15 75.438,86.741 76.073,86.106 104.14,86.106 104.648,86.614 U2.16
A7: U2.19 U3.16 | length 46.9
  Top Layer w0.254: U3.16 74.168,86.36 74.803,85.725 107.315,85.725 108.458,86.868 U2.19
A8: U1.53 U3.17 | length 24.2
  Top Layer w0.254: U3.17 v1(74.168,80.01) ; v1(76.835,98.933) 78.185,100.283 U1.53
  Bottom Layer w0.254: v1(74.168,80.01) 74.168,96.266 v1(76.835,98.933)
A9: U1.54 U3.18 | length 23.9
  Top Layer w0.254: U3.18 v1(75.438,80.01) ; v1(77.851,98.933) 78.685,99.767 U1.54
  Bottom Layer w0.254: v1(75.438,80.01) 75.438,96.52 v1(77.851,98.933)
A10: U1.55 U3.19 | length 23.6
  Top Layer w0.254: U3.19 v1(76.708,80.01) ; v1(78.867,98.933) 79.185,99.251 U1.55
  Bottom Layer w0.254: v1(76.708,80.01) 76.708,96.774 v1(78.867,98.933)
A11: U1.56 U3.20 | length 23.4
  Top Layer w0.254: U3.20 v1(77.978,80.01) ; U1.56 79.685,99.131 v1(79.883,98.933)
  Bottom Layer w0.254: v1(77.978,80.01) 77.978,97.028 v1(79.883,98.933)
A12: U1.57 U3.21 | length 23.5
  Top Layer w0.254: U3.21 v1(79.248,80.01) ; U1.57 80.185,99.647 v1(80.899,98.933)
  Bottom Layer w0.254: v1(79.248,80.01) 79.248,97.282 v1(80.899,98.933)
A13: U1.58 U3.29 | length 31.2
  Top Layer w0.254: U1.58 80.685,100.417 81.788,99.314 81.788,94.996 81.153,94.361 v1(81.153,90.297) ; U3.29 v1(89.408,80.137)
  Bottom Layer w0.254: v1(81.153,90.297) 81.28,90.17 89.027,90.17 89.408,89.789 v1(89.408,80.137)
A14: U1.59 U3.30 | length 31
  Top Layer w0.254: U1.59 81.185,100.679 82.423,99.441 v1(82.423,90.805) ; U3.30 v1(90.678,80.137)
  Bottom Layer w0.254: v1(82.423,90.805) 82.55,90.678 90.297,90.678 90.678,90.297 v1(90.678,80.137)
A15: U1.60 U3.31 | length 31.2
  Top Layer w0.254: U1.60 81.685,100.941 82.804,99.822 82.804,95.25 83.693,94.361 v1(83.693,91.313) ; U3.31 v1(91.948,80.137)
  Bottom Layer w0.254: v1(83.693,91.313) 91.186,91.313 91.948,90.551 v1(91.948,80.137)
AD0: U1.78 U2.3 U3.6 | length 37.7
  Top Layer w0.254: v1(85.344,104.775) 85.518,104.601 105.711,104.601 107.188,103.124 U2.3 ; v1(86.868,92.329) U3.6
  Bottom Layer w0.254: v1(85.344,104.775) 85.344,93.853 v1(86.868,92.329)
AD1: U1.77 U2.4 U3.7 | length 35.9
  Top Layer w0.254: v1(84.709,104.14) 84.748,104.101 104.814,104.101 105.918,102.997 U2.4 ; v1(85.598,92.329) U3.7
  Bottom Layer w0.254: v1(84.709,104.14) 84.709,93.218 v1(85.598,92.329)
AD2: U1.76 U2.7 U3.10 | length 32.4
  Top Layer w0.254: v1(81.788,92.329) U3.10 ; v1(84.074,103.505) 90.814,103.505 U1.76 101.377,103.601 102.108,102.87 U2.7
  Bottom Layer w0.254: v1(81.788,92.329) 84.074,94.615 v1(84.074,103.505)
AD3: U1.75 U2.8 U3.11 | length 31.6
  Top Layer w0.254: v1(80.518,92.329) U3.11@80.518,93.345 ; v1(83.439,96.139) 85.471,96.139 85.979,96.647 v1(85.979,99.441) ; U1.75 90.7,101.876 91.948,103.124 100.584,103.124 100.838,102.87 U2.8 ; v1(89.789,100.838) 89.789,101.876
  Bottom Layer w0.254: v1(80.518,92.329) 80.518,95.377 81.28,96.139 v1(83.439,96.139) ; v1(85.979,99.441) 86.868,100.33 89.281,100.33 v1(89.789,100.838)
AD4: U1.74 U2.13 U3.22 | length 44.5
  Top Layer w0.254: v1(82.931,87.63) 86.868,87.63 88.773,89.535 88.773,95.504 90.17,96.901 v1(90.17,99.06) 88.685,100.545 U1.74 ; v1(99.314,93.98) 100.457,93.98 100.838,93.599 U2.13
  Bottom Layer w0.254: v1(80.518,80.264) 80.518,81.026 82.931,83.439 v1(82.931,87.63) v1@82.804,87.503 ; v1(90.17,99.06) 90.297,98.933 96.52,98.933 99.314,96.139 v1(99.314,93.98)
AD5: U1.73 U2.14 U3.23 | length 44.8
  Top Layer w0.254: U3.23 v1(81.788,80.264) ; v1(83.693,88.265) 86.36,88.265 87.503,89.408 87.503,94.773 89.408,96.678 v1(89.408,98.425) 88.185,99.648 U1.73 ; v1(98.552,94.615) 100.711,94.615 102.108,93.218 U2.14
  Bottom Layer w0.254: v1(81.788,80.264) 81.788,81.28 83.693,83.185 v1(83.693,88.265) ; v1(89.408,98.425) 96.266,98.425 98.552,96.139 v1(98.552,94.615)
AD6: U1.72 U2.17 U3.26 | length 47.3
  Top Layer w0.254: v1(84.328,88.9) 85.852,88.9 86.233,89.281 86.233,94.361 88.646,96.774 v1(88.646,97.79) 87.685,98.751 U1.72 ; U3.26 v1(85.598,80.264) ; v1(97.79,95.25) 100.965,95.25 102.108,94.107 105.283,94.107 105.918,93.472 U2.17
  Bottom Layer w0.254: v1(84.328,88.9) 84.328,88.138 84.709,87.757 84.709,82.677 85.598,81.788 v1(85.598,80.264) ; v1(88.646,97.79) 96.139,97.79 97.79,96.139 v1(97.79,95.25)
AD7: U1.71 U2.18 U3.27 | length 46.9
  Top Layer w0.254: v1(84.963,89.535) 84.963,94.234 v1(87.884,97.155) 87.185,97.854 U1.71 ; U3.27 v1(86.868,80.264) ; v1(97.028,95.885) 101.092,95.885 102.362,94.615 105.537,94.615 107.188,92.964 U2.18
  Bottom Layer w0.254: v1(84.963,89.535) 84.963,89.027 85.344,88.646 85.344,83.185 86.868,81.661 v1(86.868,80.264) ; v1(87.884,97.155) 95.758,97.155 v1(97.028,95.885)
ADC0: JP107.4 U1.97
ADC1: JP107.5 U1.96
ADC2: JP107.6 U1.95
ADC3: JP107.7 U1.94
AGND: C8.2 JP107.2 R2.2 U1.99
ALE: U1.70 U2.11 | length 18.9
  Top Layer w0.254: v1@86.685,97.338 U1.70 ; v1(97.917,93.472) 98.298,93.091 U2.11
  Bottom Layer w0.254: v1(86.741,97.282) 87.757,96.266 94.869,96.266 97.663,93.472 v1(97.917,93.472)
AVCC: C8.1 R1.1 U1.100
BMP1: JP130.2 RP1.1 U1.35
BMP2: JP131.2 RP1.2 U1.36
BMP3: JP132.2 RP1.3 U1.37
BMP4: JP133.2 RP1.4 U1.38
DIAG1: RP3.8 U1.47
DIAG2: RP3.7 U1.48
DIAG3: RP3.6 U1.49
DIAG4: RP3.5 U1.50
GND: C1.2 C2.2 C3.2 C4.1 C5.1 C6.1 C7.1 C10.1 C11.1 C12.1 C13.1 C14.1 C15.1 C22.1 C32.1 C39.2 C40.2 C41.2 C42.2 C43.2 C44.2 C45.2 C46.2 C47.2 C48.1 C49.1 C60.1 C61.2 C103.2 C104.2 C105.2 CON1.3 CON1.6 D1.1 DS1.2 DS2.2 DS3.2 DS4.2 DS5.2 DS6.2 DS7.2 DS8.2 DS10.2 DS11.2 DS12.2 DS13.2 J100.5 J101.5 JP30.1 JP31.1 JP32.1 JP33.1 JP100.2 JP100.10 JP101.3 JP101.4 JP101.6 JP101.8 JP101.10 JP102.2 JP102.4 JP102.6 JP102.8 JP107.1 JP109.1 JP110.1 JP111.1 JP112.2 JP113.2 JP114.2 JP115.2 JP116.1 JP120.1 JP121.1 JP122.2 JP123.2 JP125.2 JP125.3 JP126.2 JP126.3 JP127.2 JP127.3 JP128.2 JP128.3 JP130.1 JP131.1 JP132.1 JP133.1 Q1.3 Q3.3 Q5.3 Q7.3 R2.1 R20.1 R21.1 R30.1 R31.1 R67.2 R68.2 R202.2 R204.2 R206.2 S3.1 S3.4 U1.11 U1.32 U1.62 U1.81 U2.1 U2.10 U3.5 U3.9 U3.25 U3.32 U20.4 U20.14 U20.17 U21.2 U30.4 U30.14 U30.17 U31.2 U100.15 U101.7 U200.1 VR1.3 VR1.5 VR2.4 VR3.2 W22.3 W25.3 W32.3 W35.3
IRD1: JP112.1 U1.86
IRD2: JP113.1 U1.85
IRD3: JP114.1 U1.84
IRD4: JP115.1 U1.83
LINE1: JP125.1 R100.2 U1.67
LINE2: JP126.1 R102.2 U1.68
LINE3: JP127.1 R104.2 U1.69
LINE4: JP128.1 R106.2 U1.82
MOT1_A: JP20.3 W24.2
MOT1_A\: JP20.1 Q1.4 W25.2
MOT1_AHO_A: U20.11 W20.3
MOT1_AHS: C20.2 U20.12
MOT1_B: JP20.6 W23.3
MOT1_B\: JP20.4 Q3.4 W22.2
MOT1_BHO_B: U20.20 W21.2
MOT1_BHS: C21.2 U20.19
MOT1_CENT: FH_1.2 JP20.2 JP20.5
MOT1_DC: FH_5.1 W23.2 W24.3
MOT1_DC_DIS: U20.3
MOT1_GATE_A: D22.2 R22.1 W20.1
MOT1_GATE_B: D25.2 R25.1 W21.1
MOT1_PWM_A: U1.16 U20.5 U21.1 W20.2
MOT1_PWM_A\: D23.2 R23.1 U20.13 U21.6
MOT1_PWM_B: U1.17 U20.6 U21.3 W21.3
MOT1_PWM_B\: D24.2 R24.1 U20.18 U21.4
MOT2_A: JP21.3 W34.2
MOT2_A\: JP21.1 Q5.4 W35.2
MOT2_AHO_A: U30.11 W30.3
MOT2_AHS: C30.2 U30.12
MOT2_B: JP21.6 W33.3
MOT2_B\: JP21.4 Q7.4 W32.2
MOT2_BHO_B: U30.20 W31.2
MOT2_BHS: C31.2 U30.19
MOT2_CENT: FH_3.2 JP21.2 JP21.5
MOT2_DC: FH_7.1 W33.2 W34.3
MOT2_DC_DIS: U30.3
MOT2_GATE_A: D32.2 R32.1 W30.1
MOT2_GATE_B: D35.2 R35.1 W31.1
MOT2_PWM_A: U1.6 U30.5 U31.1 W30.2
MOT2_PWM_A\: D33.2 R33.1 U30.13 U31.6
MOT2_PWM_B: U1.7 U30.6 U31.3 W31.3
MOT2_PWM_B\: D34.2 R34.1 U30.18 U31.4
MOUSE1_X1: JP120.3 U1.63
MOUSE1_X2: JP120.5 U1.12
MOUSE1_Y1: JP120.4 U1.64
MOUSE1_Y2: JP120.6 U1.13
MOUSE2_X1: JP121.3 U1.65
MOUSE2_X2: JP121.5 U1.14
MOUSE2_Y1: JP121.4 U1.66
MOUSE2_Y2: JP121.6 U1.15
NetC20_1: C20.1 D20.2 U20.10
NetC21_1: C21.1 D21.2 U20.1
NetC30_1: C30.1 D30.2 U30.10
NetC31_1: C31.1 D31.2 U30.1
NetC40_1: C40.1 L1.2 VR1.2
NetC100_1: C100.1 U100.3
NetC100_2: C100.2 U100.1
NetC101_1: C101.1 U100.5
NetC101_2: C101.2 U100.4
NetC103_1: C103.1 U100.2
NetC104_1: C104.1 U100.6
NetCON1_1: CON1.1 U101.2
NetCON1_2: CON1.2 U101.3
NetCON1_5: CON1.5 U101.4
NetCON1_7: CON1.7 U101.5
NetD1_2: D1.2 L2.1 VR1.1
NetD22_1: D22.1 Q2.1 R22.2
NetD23_1: D23.1 Q1.1 R23.2
NetD24_1: D24.1 Q3.1 R24.2
NetD25_1: D25.1 Q4.1 R25.2
NetD32_1: D32.1 Q6.1 R32.2
NetD33_1: D33.1 Q5.1 R33.2
NetD34_1: D34.1 Q7.1 R34.2
NetD35_1: D35.1 Q8.1 R35.2
NetDS1_1: DS1.1 R3.1
NetDS2_1: DS2.1 R4.1
NetDS3_1: DS3.1 R5.1
NetDS4_1: DS4.1 RP3.1
NetDS5_1: DS5.1 RP3.2
NetDS6_1: DS6.1 RP3.3
NetDS7_1: DS7.1 RP3.4
NetDS8_1: DS8.1 R10.1
NetDS10_1: DS10.1 RP2.1
NetDS11_1: DS11.1 RP2.2
NetDS12_1: DS12.1 RP2.3
NetDS13_1: DS13.1 RP2.4
NetJ100_1: J100.1 J100.4 J100.6
NetJ100_2: J100.2 U100.13
NetJ100_3: J100.3 U100.14
NetJ100_7: J100.7 J100.8
NetJ101_1: J101.1 J101.4 J101.6
NetJ101_2: J101.2 U100.8
NetJ101_3: J101.3 U100.7
NetJ101_7: J101.7 J101.8
NetJP125_4: JP125.4 R101.2
NetJP126_4: JP126.4 R103.2
NetJP127_4: JP127.4 R105.2
NetJP128_4: JP128.4 R107.2
NetQ2_3: Q2.3 W25.1
NetQ2_4: Q2.4 W24.1
NetQ4_3: Q4.3 W22.1
NetQ4_4: Q4.4 W23.1
NetQ6_3: Q6.3 W35.1
NetQ6_4: Q6.4 W34.1
NetQ8_3: Q8.3 W32.1
NetQ8_4: Q8.4 W33.1
NetR20_2: R20.2 U20.8
NetR21_2: R21.2 U20.9
NetR30_2: R30.2 U30.8
NetR31_2: R31.2 U30.9
NetR65_1: R65.1 S1.3
NetR66_1: R66.1 S2.3
NetR67_1: R67.1 S1.1
NetR68_1: R68.1 S2.1
PL4: JP105.1 U1.39
PL5: JP105.2 U1.40
PL6: JP105.3 U1.41
PL7: JP105.4 U1.42
RD*: U1.52 U3.28
RESET: JP100.6 JP101.5 R11.2 R200.1 U1.30 U200.3
RXD1: RP2.7 U1.2 U100.12
RXD2: RP2.5 U1.45 U100.9
SCL: JP109.4 JP110.4 JP111.4 R111.1 U1.43
SD_CARD_DETECT: CON1.10 R108.1 U1.4
SD_CARD_WP: CON1.11 R109.1 U1.9
SD_TRI_STATE: U1.8 U101.8
SDA: JP109.3 JP110.3 JP111.3 R110.1 U1.44
SOUND_OUT_PWM: JP116.3 U1.5
SPI_MISO: JP30.6 JP31.6 JP32.6 JP33.6 JP101.9 U1.22 U101.10
SPI_MOSI: JP30.5 JP31.5 JP32.5 JP33.5 JP101.1 U1.21 U101.12
SPI_SCK: JP30.4 JP31.4 JP32.4 JP33.4 JP101.7 U1.20 U101.11
SPI_SS2*: JP30.3 U1.23
SPI_SS3*: JP31.3 U1.24
SPI_SS4*: JP32.3 U1.25
SPI_SS5*: JP33.3 U1.26
SPI_SS*: U1.19 U101.13
SW1: C60.2 S1.2 U1.18
SW2: C61.1 S2.2 U1.27
TCK: JP100.1 U1.93
TDI: JP100.9 U1.90
TDO: JP100.3 U1.91
TMS: JP100.5 U1.92
TOSC1: C6.2 U1.29 Y2.1
TOSC2: C7.2 U1.28 Y2.2
TXD1: RP2.8 U1.3 U100.11
TXD2: RP2.6 U1.46 U100.10
VBAT: C39.1 C42.1 C44.1 C45.1 FH_1.1 FH_3.1 FH_5.2 FH_7.2 JP122.1 L1.1 R3.2 R201.1 S3.2 S3.5 VR2.1
VBATIN: JP123.1 S3.3 S3.6
VBATSENSE: R201.2 R202.1 U1.89
WR*: U1.51 U3.12 | length 10.7
  Top Layer w0.254: U1.51 77.185,100.68 75.819,99.314 75.819,98.679 79.248,95.25 U3.12
XTAL1: C5.2 U1.34 Y1.2
XTAL2: C4.2 U1.33 Y1.1
pads on no net: CON1. CON1.8 CON1.9 CON1.12 FH_1. FH_3. FH_5. FH_7. J100.9 J101.9 JP20.nc JP21.nc JP100.8 JP102.nc U1.1 U1.98 U101.6 U101.9 VR3.4

## Keep-outs
Keep-Out Layer:
  lines w0.254: 32,40 38,40 ; 32,180 38,180 ; 34.492,41.524 35,40 ; 34.492,178.476 35,180 ; 35,104.261 35,40 ; 35,115.739 35,180 ; 35.508,41.524 35,40 ; 35.508,178.476 35,180 ; 40,182 40,188 ; 41.524,184.492 40,185 ; 41.524,185.508 40,185 ; 104.261,185 40,185 ; 115.739,185 180,185 ; 178.476,184.492 180,185 ; 178.476,185.508 180,185 ; 180,182 180,188 ; 40.132,40.132 179.832,40.132 179.832,179.832 40.132,179.832 40.132,40.132
  text "140 (mm)" at 104.515,184.086 h1.52
  text "140 (mm)" at 35.914,104.515 h1.52 r90

## Text inside footprints (layer, text, board x,y; h text height)
J100: Top Overlay "1" at 395.45,202.015 h1.5 r90; Top Overlay "5" at 395.45,212.845 h1.5 r90; Top Overlay "9" at 389.675,213.205 h1.5 r90; Top Overlay "6" at 389.675,201.405 h1.5 r90
J101: Top Overlay "6" at 375.451,201.913 h1.5 r90; Top Overlay "9" at 375.451,213.713 h1.5 r90; Top Overlay "5" at 381.226,213.353 h1.5 r90; Top Overlay "1" at 381.226,202.523 h1.5 r90
JP100: Top Overlay "10" at 352.679,140.335 h1.27 r90; Top Overlay "9" at 355.219,140.335 h1.27 r90; Top Overlay "1" at 355.219,126.619 h1.27 r90; Top Overlay "2" at 352.679,126.111 h1.27 r90
JP101: Top Overlay "10" at 461.899,181.737 h1.27 r90; Top Overlay "9" at 464.439,181.737 h1.27 r90; Top Overlay "1" at 464.439,168.021 h1.27 r90; Top Overlay "2" at 461.899,167.513 h1.27 r90
U200: Top Overlay "1" at 250.198,57.33 h1.5; Top Overlay "3" at 250.198,59.776 h1.5